# EAGLE board 100x100_test (EAGLE 6.5.0)

No outline drawn. Coordinates in mm, seen from the top.
Copper layers (1*16): Top 0.035mm / dielectric 1.5mm / Bottom 0.035mm
Design rules "default": minimum track width 10mil, minimum drill 24mil, track to track 8mil, track to pad 8mil, pad to pad 8mil, via to via 8mil, smd to smd 8mil, copper to edge 40mil, drill to drill 8mil, minimum pad ring 10mil, minimum via ring 8mil, stop-mask expansion 4mil, vias tented up to drill 0mil, thermal gap 10mil

## Footprints (pad centres in the part's own frame; a part is rotated, then mirrored left to right if it is on the bottom)
5,5-PAD-SQUARE = drill 5.5 pad 9 square: B5,5 0,0

## Placement (x,y rotation side)
E$1  [5,5-PAD-SQUARE]  50,50 0 top

## Library data of the parts
E$1 = holes

## Tracks (layer width: path | path; a pad name or v marks a point on that pad's centre or on a via)
(copper drawn outside any net)
  shapes: Bottom area x1